# EAGLE board newbutton (EAGLE 9.3.0)
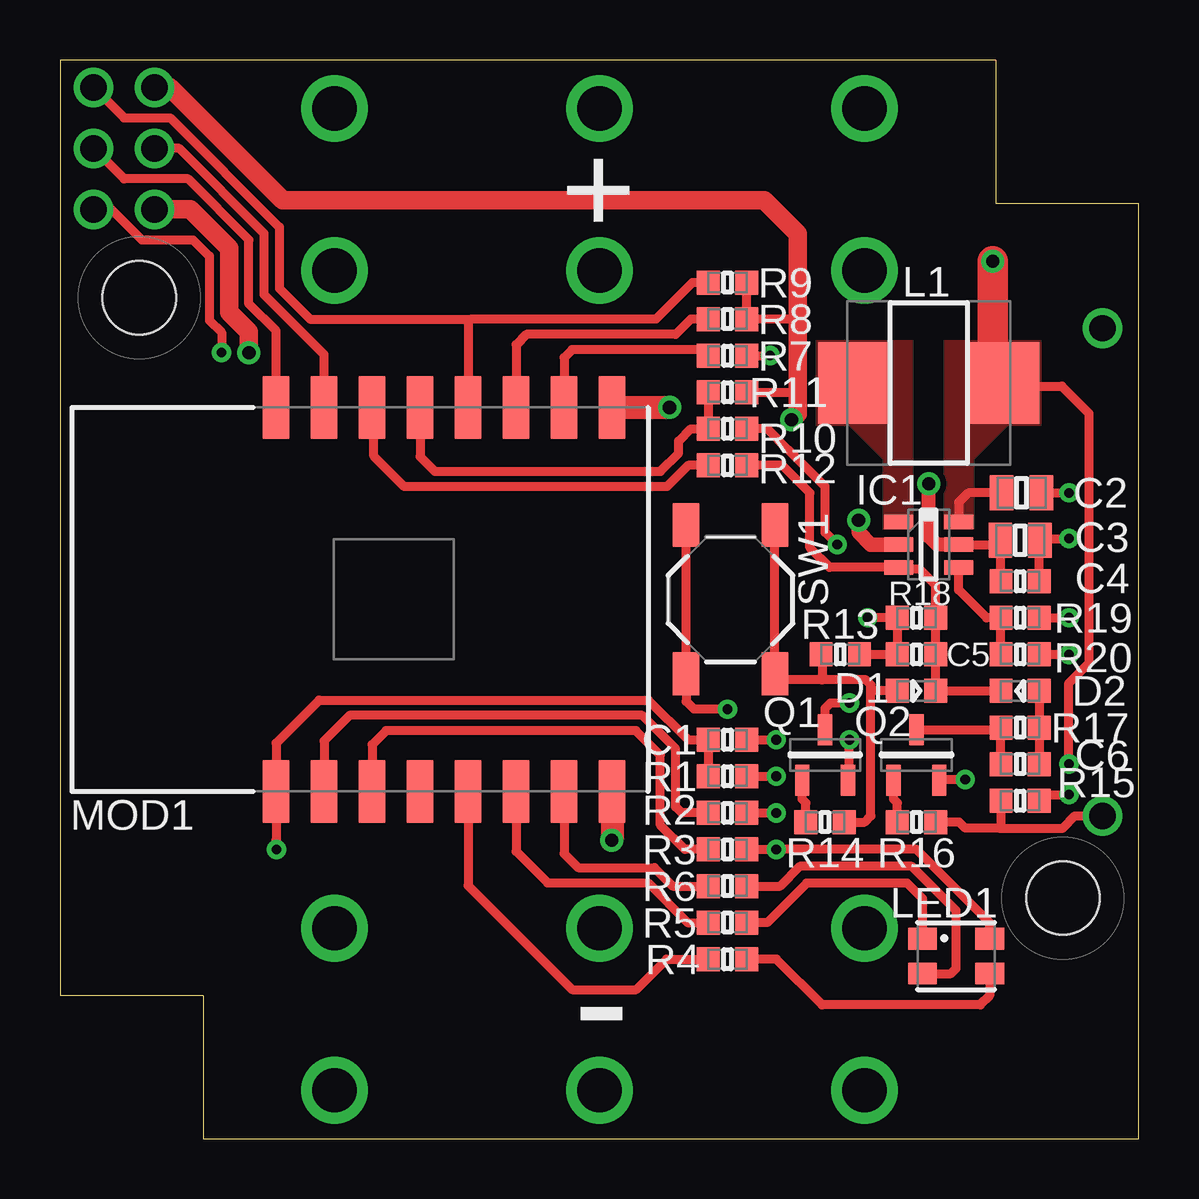
[diagram p0: board, top side]
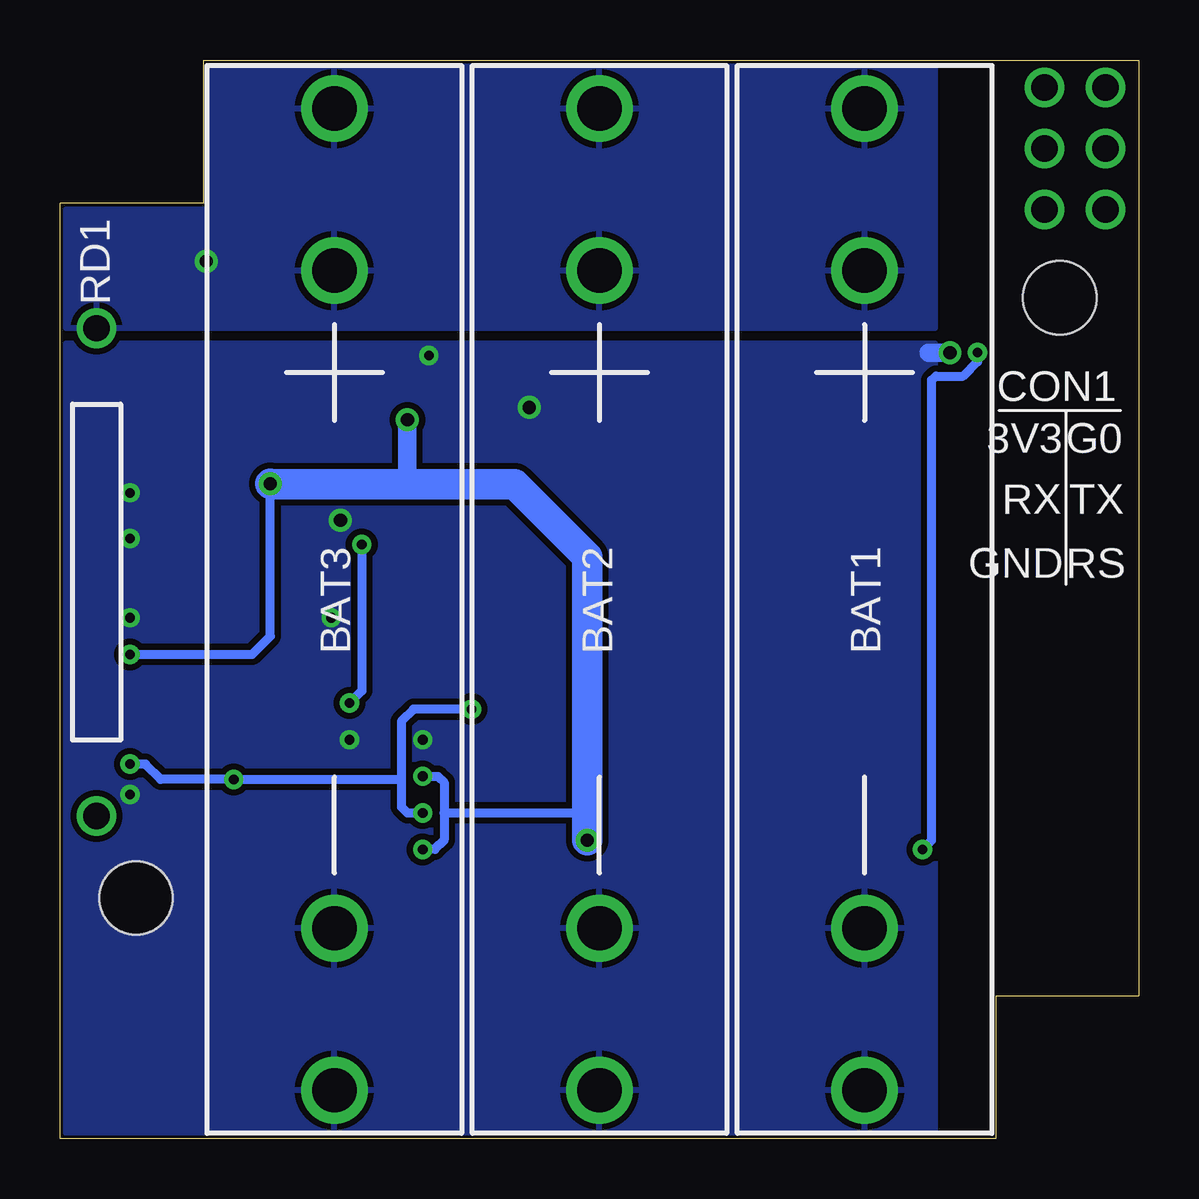
[diagram p1: board, bottom side, seen from below]

Size 44.96 x 44.96 mm. Coordinates in mm from the lower left corner, seen from the top.
Outline: 5.97,0 44.96,0 44.96,38.99 38.99,38.99 38.99,44.96 0,44.96 0,5.97 5.97,5.97 5.97,0
Copper layers (1*16): Top 0.035mm / dielectric 1.5mm / Bottom 0.035mm
Design rules "default": minimum track width 15mil, minimum drill 0.35mm, track to track 10mil, track to pad 10mil, pad to pad 10mil, via to via 10mil, smd to smd 0mil, copper to edge 0mil, drill to drill 6mil, minimum pad ring 10mil, minimum via ring 8mil, stop-mask expansion 4mil, vias tented up to drill 25mil, thermal gap 10mil
Net classes: 0 default: width 0.381 mm, drill 0.381 mm, clearance 0.254 mm
Holes 3.05 mm at 41.78,10.03 3.3,35.05

## Footprints (pad centres in the part's own frame; a part is rotated, then mirrored left to right if it is on the bottom)
AAA-CONTACTS = drill 1.85: 1 -13.7,0; 2 13.7,0; 3 -20.45,0; 4 20.45,0
0603 = smd 0.95 x 1: 1 -0.8,0; 2 0.8,0
0805 = smd 0.97 x 1.47: 1 -0.83,0; 2 0.83,0
HEADER-6P-2R-DIP-2_54MM = drill 1.1 pad 1.65: 1 0,-2.54; 2 2.54,-2.54; 3 5.08,-2.54; 4 0,0; 5 2.54,0; 6 5.08,0
0603-DIODE = smd 0.95 x 1: 1 -0.8,0; 2 0.8,0
SOT23-6 = smd 1.2 x 0.6: 1 -1.25,0.95; 2 -1.25,0; 3 -1.25,-0.95; 4 1.25,-0.95; 5 1.25,0; 6 1.25,0.95
INDUCTOR-0520-0630 = smd 3 x 3.4: 1 -3.1,0; 2 3.1,0
LED-RGB-3528-PLCC4 = smd 1.2 x 0.9: 1 -1.4,0.725; 2 -1.4,-0.725; 3 1.4,-0.725; 4 1.4,0.725
ESP-12S = smd 2.6 x 1.1: 1 -8,7; 2 -8,5; 3 -8,3; 4 -8,1; 5 -8,-1; 6 -8,-3; 7 -8,-5; 8 -8,-7; 9 8,-7; 10 8,-5; 11 8,-3; 12 8,-1; 13 8,1; 14 8,3; 15 8,5; 16 8,7
SOT23-3 = smd 1.3 x 0.6: 1 -1.05,0.95; 2 -1.05,-0.95; 3 1.05,0
REED-DIP = drill 1.1: P$1 -10.16,0; P$2 10.16,0
BUTTON-4P-SMD-5X5 = smd 1.8 x 1.1: 1 -3.1,1.85; 2 -3.1,-1.85; 3 3.1,-1.85; 4 3.1,1.85

## Placement (x,y rotation side)
BAT1  [AAA-CONTACTS]  11.43,22.48 270 bottom
BAT2  [AAA-CONTACTS]  22.48,22.48 270 bottom
BAT3  [AAA-CONTACTS]  33.53,22.48 270 bottom
C1  [0603]  27.81,16.64 180 top
C2  [0805]  40.06,26.92 180 top
C3  [0805]  40.01,24.95 180 top
C4  [0603]  40.01,23.24 180 top
C5  [0603]  35.69,20.19 0 top
C6  [0603]  40.01,15.62 0 top
CON1  [HEADER-6P-2R-DIP-2_54MM]  3.94,43.81 270 top
D1  [0603-DIODE]  35.69,18.67 0 top
D2  [0603-DIODE]  40.01,18.67 180 top
IC1  [SOT23-6]  36.2,24.77 0 top
L1  [INDUCTOR-0520-0630]  36.2,31.5 0 top
LED1  [LED-RGB-3528-PLCC4]  37.34,7.62 0 top
MOD1  [ESP-12S]  16,22.48 90 top
Q1  [SOT23-3]  31.88,16 90 top
Q2  [SOT23-3]  35.69,16 90 top
R1  [0603]  27.81,15.11 180 top
R2  [0603]  27.81,13.59 180 top
R3  [0603]  27.81,12.06 180 top
R4  [0603]  27.81,7.49 180 top
R5  [0603]  27.81,9.02 180 top
R6  [0603]  27.81,10.54 180 top
R7  [0603]  27.81,32.64 0 top
R8  [0603]  27.81,34.16 0 top
R9  [0603]  27.81,35.69 180 top
R10  [0603]  27.81,29.59 0 top
R11  [0603]  27.81,31.11 0 top
R12  [0603]  27.81,28.07 0 top
R13  [0603]  32.51,20.19 0 top
R14  [0603]  31.88,13.21 180 top
R15  [0603]  40.01,14.1 180 top
R16  [0603]  35.69,13.21 180 top
R17  [0603]  40.01,17.14 0 top
R18  [0603]  35.69,21.72 0 top
R19  [0603]  40.01,21.72 180 top
R20  [0603]  40.01,20.19 0 top
RD1  [REED-DIP]  43.43,23.62 270 bottom
SW1  [BUTTON-4P-SMD-5X5]  27.94,22.48 90 top

## Library data of the parts
BAT1-BAT3 C1-C6 CON1 D1 D2 IC1 L1 LED1 MOD1 Q1 Q2 R1-R20 RD1 SW1 = SamacSys_Parts

## Nets
GND: BAT1.2 BAT1.4 BAT2.2 BAT2.4 BAT3.2 BAT3.4 C1.1 C2.1 C3.1 C4.1 C5.1 CON1.6 IC1.2 MOD1.9 Q1.2 R7.2 R13.2 R15.1 R18.1 R19.1
N$1: IC1.1 L1.1
N$2: MOD1.2 R2.2
N$3: MOD1.3 R3.2
N$4: MOD1.5 R4.2
N$5: MOD1.6 R5.2
N$6: MOD1.7 R6.2
N$7: MOD1.10 R7.1
N$8: MOD1.11 R8.1
N$9: MOD1.13 R10.1 R11.1
N$10: MOD1.14 R12.1
N$12: Q1.3 R10.2
N$13: C5.2 D1.2 D2.2 IC1.3 R12.2 R18.2
N$14: CON1.1 MOD1.12 R9.2
N$15: CON1.5 MOD1.15
N$16: CON1.2 MOD1.16
N$17: C1.2 CON1.3 MOD1.1 R1.2
N$18: LED1.3 R4.1
N$19: LED1.1 R5.1
N$20: LED1.2 R6.1
N$21: D1.1 R13.1 R14.1 SW1.2 SW1.3
N$23: R15.2 R16.1 RD1.P$2
N$24: Q2.1 R16.2
N$25: C6.1 Q2.3 R17.1
N$26: C6.2 D2.1 R17.2
N$27: IC1.4 R19.2 R20.1
N$28: Q1.1 R14.2
N$29: BAT1.1 BAT1.3 BAT2.1 BAT2.3 BAT3.1 BAT3.3 C2.2 IC1.6 L1.2 Q2.2 R2.1 RD1.P$1 SW1.1 SW1.4
VCC: C3.2 C4.2 CON1.4 IC1.5 LED1.4 MOD1.8 R1.1 R3.1 R8.2 R9.1 R11.2 R20.2

## Tracks (layer width: path | path; a pad name or v marks a point on that pad's centre or on a via)
GND  (via drill 0.4, 0.55)
  Top 0.381: C4.1 40.8,24.92 C3.1 40.9,25.02 v42.04,25.02 | R7.2 v29.59,32.64 | C1.1 v29.84,16.64 | Q1.2 32.86,14.99 32.89,14.99 v32.89,16.64 | R15.1 41.06,14.35 v42.04,14.35 | R19.1 v42.04,21.72 | C2.1 v42.04,26.92 | v33.66,21.72 R18.1 C5.1 R13.2
  Top 0.61: IC1.2 33.78,24.77 33.27,25.27 v33.27,25.78
  Top 0.762: CON1.6 5.44,38.73 7.05,37.12 7.05,34.46 7.87,33.63 v7.87,32.77
  Top 0.965: MOD1.9 v25.4,30.48
  Bottom 0.762: v7.87,32.77 8.76,32.77
  pour Bottom: 8.51,0.25 44.7,0.25 44.7,33.15 8.51,33.15
N$1
  pour Top (no thermals): 34.29,25.4 35.56,25.4 35.56,28.32 35.56,33.27 31.5,33.27 31.5,29.72 32.89,29.72 34.29,28.32
N$2
  Top 0.381: R2.2 25.91,13.59 25.65,13.84 25.65,16.26 24.26,17.65 12.06,17.65 11,16.59 MOD1.2
N$3
  Top 0.381: R3.2 26.04,12.06 25.02,13.08 25.02,15.99 23.99,17.02 13.59,17.02 13,16.43 MOD1.3
N$4
  Top 0.381: MOD1.5 17,10.56 21.34,6.22 24,6.22 25.27,7.49 R4.2
N$5
  Top 0.381: MOD1.6 19,11.99 20.32,10.67 24.5,10.67 26.15,9.02 R5.2
N$6
  Top 0.381: MOD1.7 21,11.89 21.59,11.3 24.77,11.3 25.53,10.54 R6.2
N$7
  Top 0.381: R7.1 26.76,32.89 21.34,32.89 21,32.56 MOD1.10
N$8
  Top 0.381: R8.1 26.29,34.16 25.65,33.53 19.43,33.53 19,33.1 MOD1.11
N$9
  Top 0.381: MOD1.13 15,28.43 15.62,27.81 25.02,27.81 25.78,28.57 25.78,29.08 26.29,29.59 R10.1 R11.1
N$10
  Top 0.381: R12.1 26.17,28.07 25.28,27.18 14.35,27.18 13.08,28.45 13.08,30.4 MOD1.14
N$12  (via drill 0.4)
  Top 0.381: Q1.3 31.88,17.94 32.1,18.16 v32.89,18.16 | v32.38,24.77 31.88,25.27 31.88,27.19 30.36,28.7 30.35,28.7 29.46,29.59 R10.2
  Bottom 0.381: v32.38,24.77 32.38,18.67 v32.89,18.16
N$13
  Top 0.381: D2.2 D1.2 C5.2 R18.2 36.49,23.08 35.81,23.75 35.01,23.75 IC1.3 32.06,23.82 31.24,24.64 31.24,26.92 30.1,28.07 R12.2
N$14
  Top 0.381: R9.2 26.35,35.69 24.83,34.16 17.14,34.16 | 17.14,34.16 17.02,34.04 17.02,30.5 MOD1.12 | CON1.1 2.67,42.55 4.59,42.55 9.14,37.99 9.14,35.44 10.42,34.16 17.14,34.16
N$15
  Top 0.381: MOD1.15 11,32.69 8.51,35.18 8.51,37.73 4.96,41.27 CON1.5
N$16
  Top 0.381: MOD1.16 9,33.67 7.87,34.8 7.87,37.47 5.33,40.01 2.67,40.01 CON1.2
N$17  (via drill 0.4)
  Top 0.381: R1.2 C1.2 26.17,16.64 24.52,18.29 10.79,18.29 9,16.5 MOD1.1 9,12.46 9.02,12.45 v9.02,12.06 | CON1.3 2.14,38.73 3.41,37.47 5.54,37.47 6.22,36.78 6.22,34.11 6.73,33.61 v6.73,32.77
  Bottom 0.381: v9.02,12.06 8.64,12.45 8.64,31.62 8.47,31.79 7.33,31.79 6.73,32.38 v6.73,32.77
N$18
  Top 0.381: LED1.3 38.74,5.97 38.35,5.59 31.75,5.59 29.84,7.49 R4.1
N$19
  Top 0.381: LED1.1 35.94,10.02 35.3,10.66 31.11,10.66 29.46,9.02 R5.1
N$20
  Top 0.381: LED1.2 37.12,6.89 37.34,7.11 37.34,9.52 35.49,11.36 30.83,11.36 30.01,10.54 R6.1
N$21
  Top 0.381: R14.1 33.53,13.21 33.78,13.46 33.78,18.67 | 31.75,19.12 33.58,19.12 33.78,18.92 33.78,18.67 | 31.75,19.12 30.04,19.12 SW1.2 SW1.3 | D1.1 33.78,18.67 | R13.1 31.75,20.16 31.75,19.12
N$23
  Top 0.381: 39.12,12.95 41.78,12.95 42.29,13.46 RD1.P$2 | 39.12,12.95 37.72,12.95 37.47,13.21 R16.1 | R15.2 39.2,13.04 39.12,12.95
N$24
  Top 0.381: R16.2 34.89,14.01 34.74,14.16 Q2.1
N$25
  Top 0.381: C6.1 R17.1 39.11,17.05 Q2.3
N$26
  Top 0.381: D2.1 R17.2 C6.2
N$27
  Top 0.381: R20.1 R19.2 38.61,21.72 37.45,22.88 IC1.4
N$28
  Top 0.381: R14.2 31.08,14.01 30.93,14.16 Q1.1
N$29  (via drill 0.4, 0.55)
  Top 0.381: R2.1 v29.84,13.59 | Q2.2 36.67,14.99 v37.72,14.99 | v27.81,17.91 26.42,17.91 26.09,18.24 SW1.1 SW1.4 | v42.04,15.62 42.04,18.99 42.88,19.84 42.88,30.23 41.74,31.37 39.42,31.37 L1.2 | C2.2 37.85,26.92 37.45,26.52 IC1.6
  Top 1.27: v38.86,36.58 38.86,31.93 L1.2
  Bottom 0.381: v29.84,13.59 30.48,13.59 30.73,13.84 30.73,14.99 | v27.81,17.91 30.23,17.91 30.73,17.4 30.73,14.99 | 30.73,14.99 v37.72,14.99 40.77,14.99 41.4,15.62 v42.04,15.62
  pour Top (no thermals): 36.83,25.4 38.1,25.4 38.1,28.32 39.5,29.72 40.89,29.72 40.89,33.27 36.83,33.27
  pour Bottom: 8.51,33.78 44.7,33.78 44.7,38.73 38.73,38.73 38.73,44.7 8.51,44.7
VCC  (via drill 0.4, 0.55)
  Top 0.381: 30.73,34.04 30.61,34.16 R8.2 R9.1 | C4.2 39.2,24.64 | 39.2,24.64 39.2,24.92 C3.2 | IC1.5 39.08,24.77 39.2,24.64 | R1.1 v29.84,15.11 | R3.1 v29.84,12.06 35.69,12.06 38.74,9.01 LED1.4 | R20.2 v42.04,20.19 | R11.2 30.73,31.11
  Top 0.584: IC1.5 36.54,24.77 36.2,25.11 v36.2,27.3
  Top 0.762: CON1.4 4.57,43.81 9.27,39.12 29.34,39.12 30.73,37.72 30.73,34.04 30.73,31.11 30.73,30.23 v30.48,29.97
  Top 0.965: MOD1.8 23,12.46 v22.99,12.45
  Bottom 0.381: v29.84,15.11 29.21,15.11 28.96,14.86 28.96,13.59 | 28.96,13.59 28.96,12.45 29.34,12.06 v29.84,12.06 | 28.96,13.59 22.99,13.59 | v42.04,20.19 36.96,20.19 36.2,20.95 v36.2,27.3
  Bottom 0.762: v30.48,29.97 30.48,27.27
  Bottom 1.27: v36.2,27.3 36.16,27.27 30.48,27.27 26,27.27 22.99,24.26 22.99,13.59 v22.99,12.45

## Text on the board
tPlace: + | -
bPlace: G0 | 3V3 | TX | RX | RS | GND